# Altium PCB UVM AERO BSPD.PcbDoc (part 1 of 2)
Units mil, origin at the board's own origin, x right, y up, seen from the top; angles counter-clockwise.
Board outline 3235 x 3490 mil, 2 copper layers (Top Layer, Bottom Layer), stack 58.8 mil thick; 114 components, 64 nets, 312 pads, 72 vias.
Unrouted connection lines stored in the file: 7.
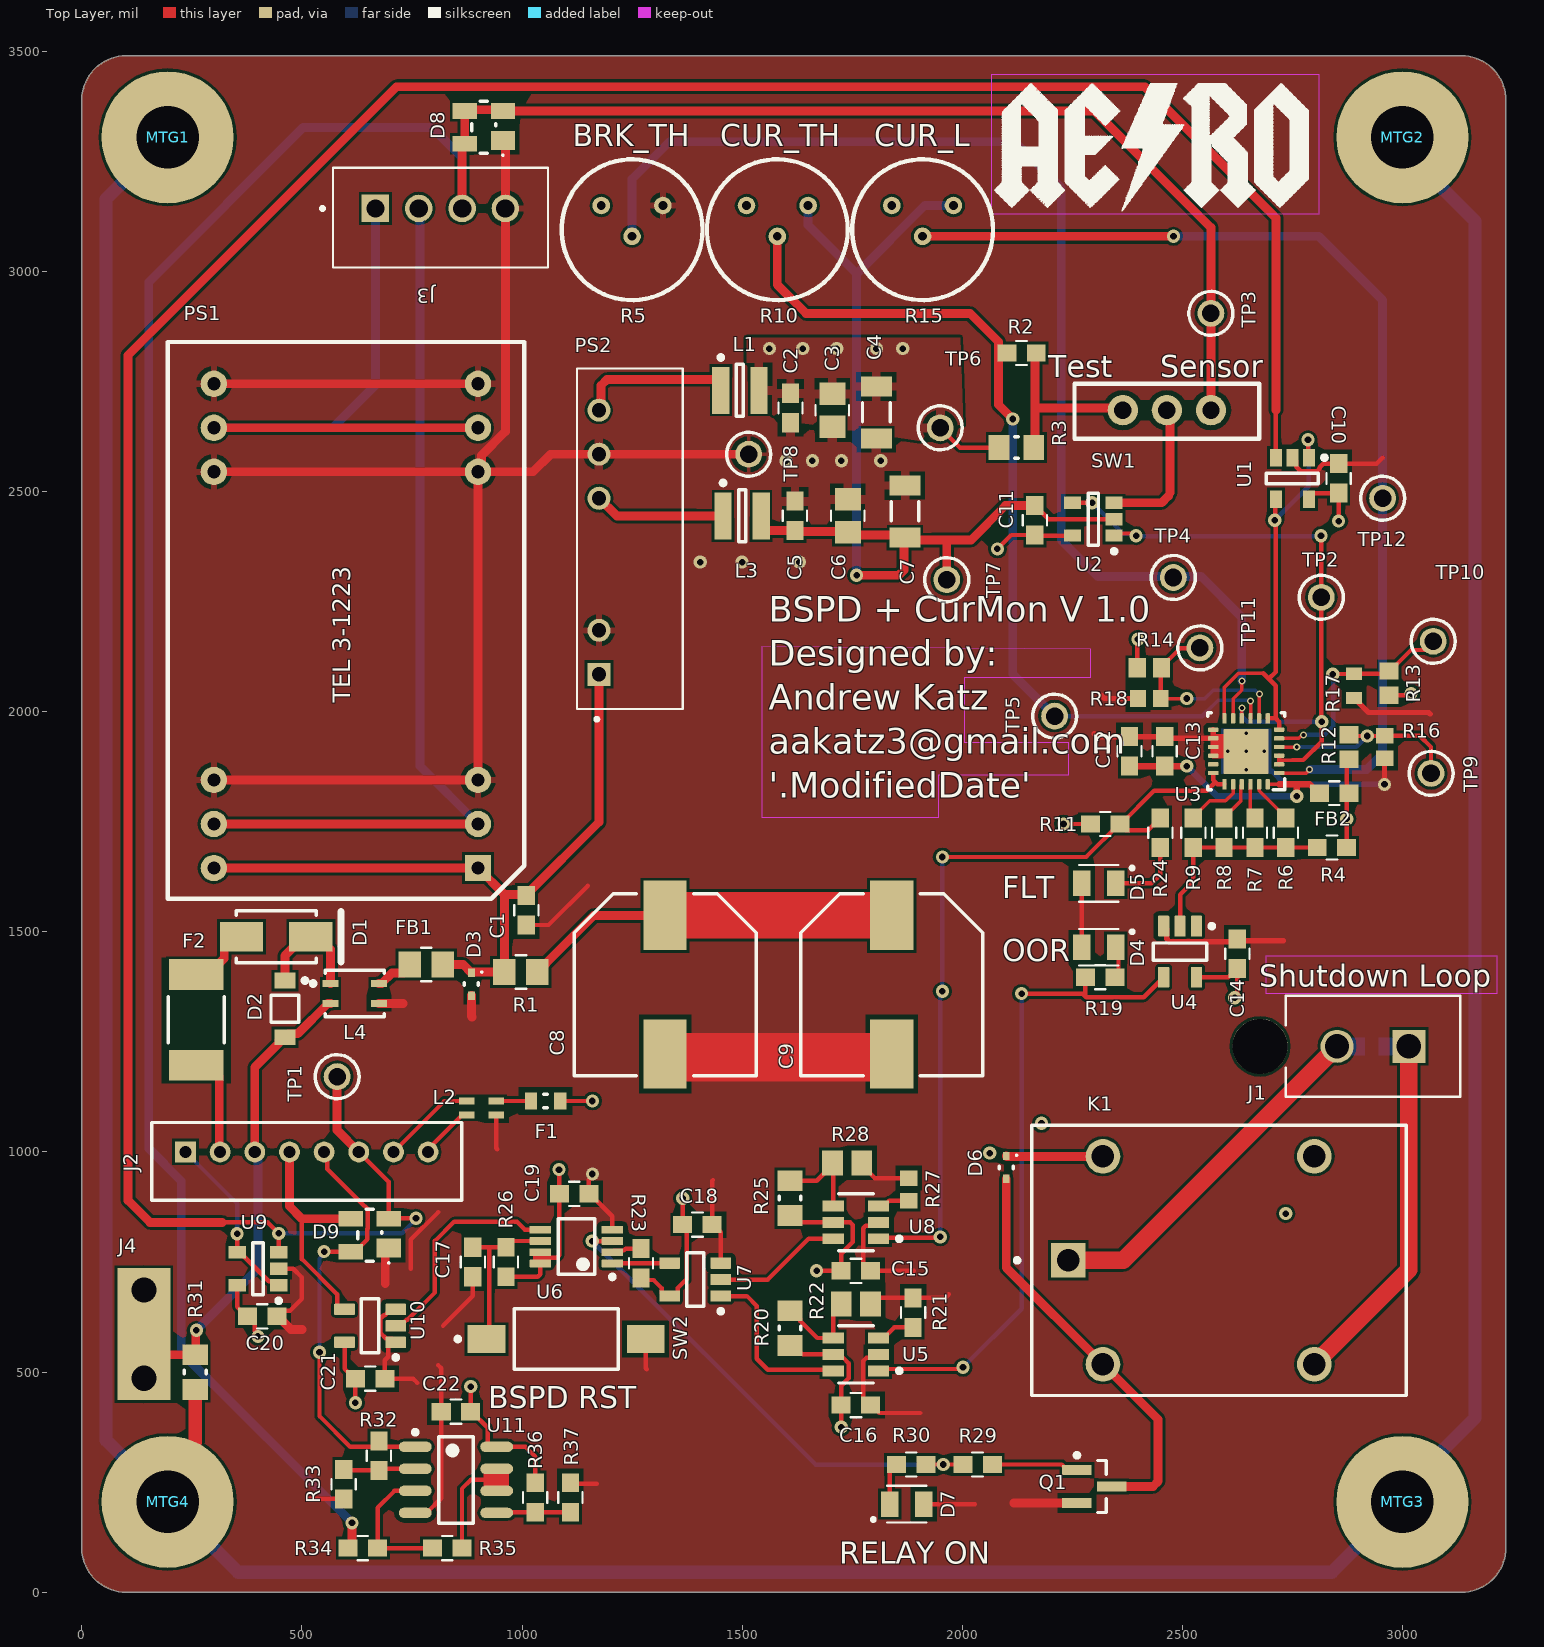
[diagram p0: Top Layer view]
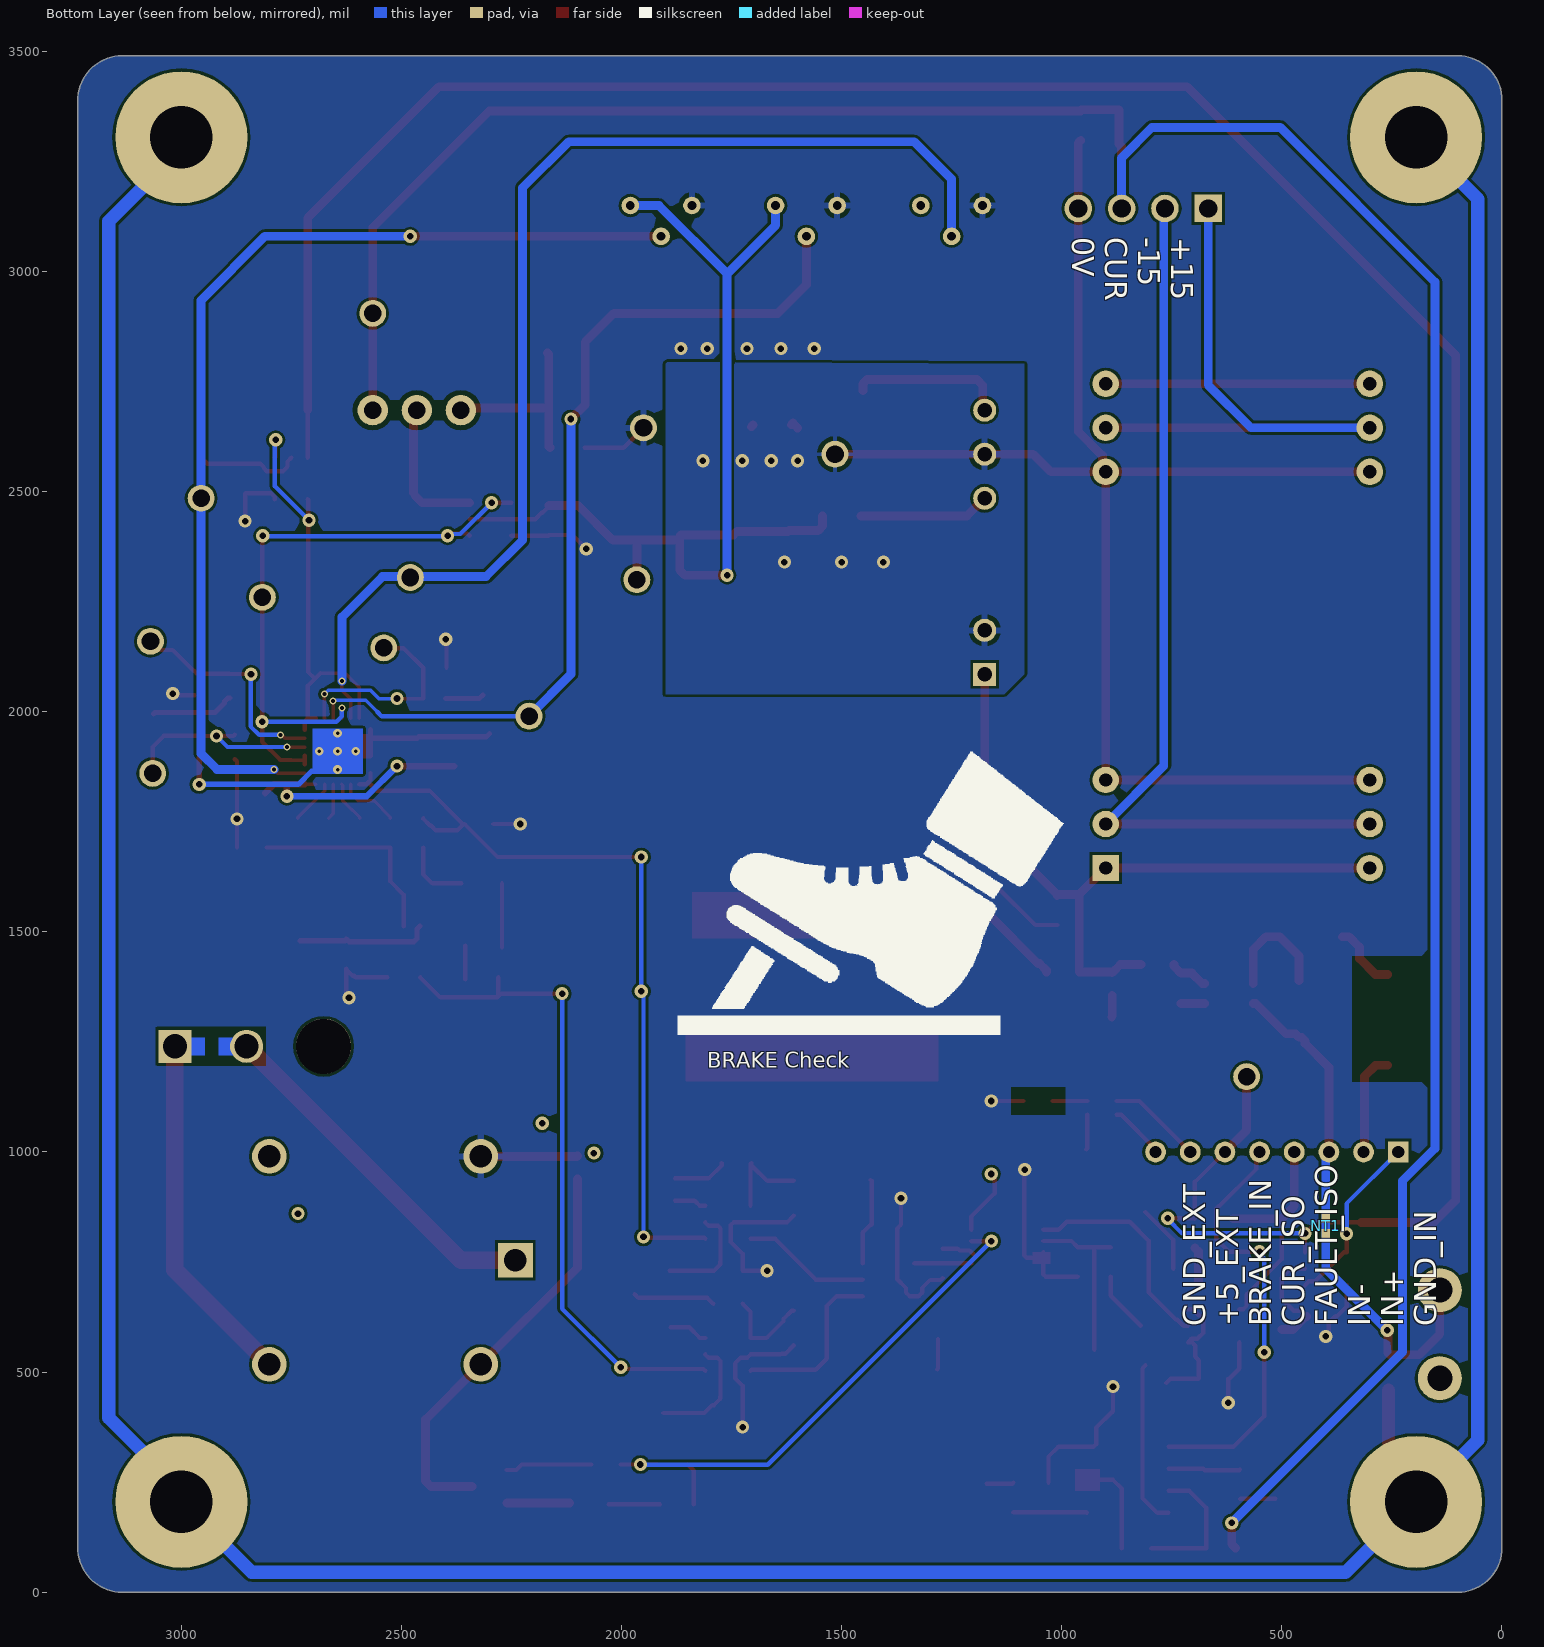
[diagram p1: Bottom Layer view, seen from below]
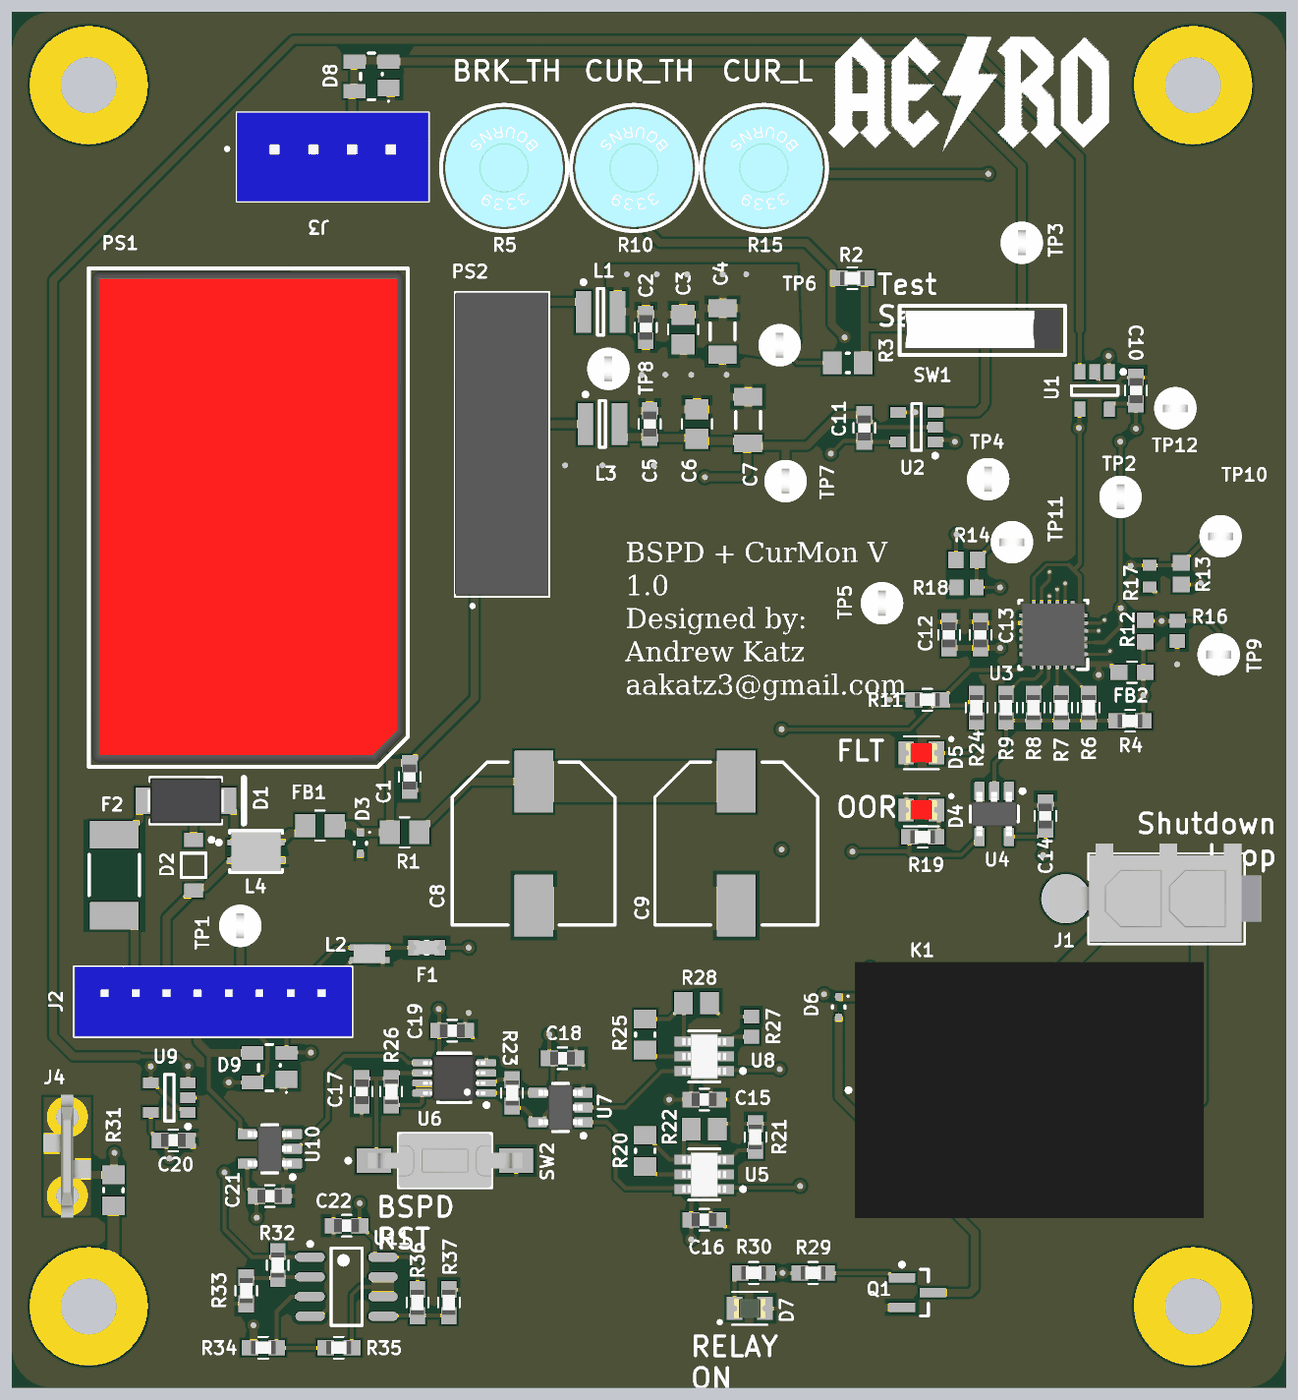
[diagram p3: 3D render of the assembled board from above, using the file's embedded part models]

## Layer stack, top to bottom
Top Solder: solder mask 1, SM-001, Dk 4
Top Layer: signal copper 1.4
Dielectric 1: core 56, FR-4, Dk 4.2
Bottom Layer: signal copper 1.4
Bottom Solder: solder mask 1, SM-001, Dk 4

## Board outline
3235,100 cw(c3135,100) 3135,0 100,0 cw(c100,100) 0,100 0,3390 cw(c100,3390) 100,3490 3135,3490 cw(c3135,3390) 3235,3390

## Design rules (kind name [scope] priority, off if disabled: settings)
Clearance Clearance_1 [IsStitchingVia vs (OnLayer('Top Overlay'))] p1: gap=6 ignorepadtopadclearanceinfootprint=FALSE except(0: Arc-Hole Track-Hole SMDPad-Hole THPad-Hole Via-Hole Fill-Hole Poly-Hole Region-Hole Text-Hole; 10: Arc-THPad Arc-Text Track-THPad Track-Text SMDPad-THPad SMDPad-Text THPad-THPad THPad-Text Fill-Text Poly-Text Region-Text Text-Text; 15: Via-Text)
Clearance [All] p2: gap=6 ignorepadtopadclearanceinfootprint=FALSE except(0: Arc-Hole Track-Hole SMDPad-Hole THPad-Hole Via-Hole Fill-Hole Poly-Hole Region-Hole Text-Hole; 10: Arc-THPad Arc-Text Track-THPad Track-Text SMDPad-THPad SMDPad-Text THPad-THPad THPad-Text Via-Text Fill-Text Poly-Text Region-Text Text-Text)
ComponentClearance [All vs NOT HasFootprint('20MIL_TIE')] p1: gap=10 collisioncheckmode=3 verticalgap=10 showdistances=FALSE
Creepage [All] p1: checkdistance=6
HoleSize [All] p1: absolutevalues=TRUE maxlimit=200 minlimit=7.87 maxpercent=80.000 minpercent=20.000
MinimumAnnularRing [All] p1: minimumring=3
MinimumSolderMaskSliver [All] p1: minsoldermaskwidth=1
PolygonConnect PolygonConnect_1 [All vs IsNamedPolygon('TOP_GND') or IsNamedPolygon('BOT_+5')] p1: thpad.connectstyle=Relief thpad.reliefconductorwidth=15 thpad.reliefentries=4 thpad.polygonreliefangle="90 Angle" thpad.airgapwidth=10 smdpad.connectstyle=NoConnect smdpad.reliefconductorwidth=10 smdpad.reliefentries=4 smdpad.polygonreliefangle="90 Angle" smdpad.airgapwidth=10 via.connectstyle=Direct via.reliefconductorwidth=10 via.reliefentries=4 via.polygonreliefangle="90 Angle" via.airgapwidth=10
PolygonConnect PolygonConnect_3 [All vs IsNamedPolygon('+5_TOP')] p2: thpad.connectstyle=Relief thpad.reliefconductorwidth=20 thpad.reliefentries=4 thpad.polygonreliefangle="90 Angle" thpad.airgapwidth=10 smdpad.connectstyle=Relief smdpad.reliefconductorwidth=20 smdpad.reliefentries=4 smdpad.polygonreliefangle="90 Angle" smdpad.airgapwidth=10 via.connectstyle=Direct via.reliefconductorwidth=10 via.reliefentries=4 via.polygonreliefangle="90 Angle" via.airgapwidth=10
PolygonConnect PolygonConnect_2 [All vs IsNamedPolygon('GND_PSU')] p3: thpad.connectstyle=Relief thpad.reliefconductorwidth=20 thpad.reliefentries=4 thpad.polygonreliefangle="90 Angle" thpad.airgapwidth=10 smdpad.connectstyle=Relief smdpad.reliefconductorwidth=20 smdpad.reliefentries=4 smdpad.polygonreliefangle="90 Angle" smdpad.airgapwidth=10 via.connectstyle=Direct via.reliefconductorwidth=20 via.reliefentries=4 via.polygonreliefangle="90 Angle" via.airgapwidth=10
PolygonConnect [All] p4: thpad.connectstyle=Relief thpad.reliefconductorwidth=15 thpad.reliefentries=4 thpad.polygonreliefangle="90 Angle" thpad.airgapwidth=10 smdpad.connectstyle=Relief smdpad.reliefconductorwidth=10 smdpad.reliefentries=4 smdpad.polygonreliefangle="90 Angle" smdpad.airgapwidth=5 via.connectstyle=Direct via.reliefconductorwidth=10 via.reliefentries=4 via.polygonreliefangle="90 Angle" via.airgapwidth=10
RoutingVias [All] p1: holewidth=15 width=30 viastyle="Through Hole" minholewidth=8.27 minwidth=15.75 maxholewidth=50 maxwidth=100
SilkToSolderMaskClearance [IsPad     or IsVia] p1: minsilkscreentomaskgap=1.8 clearancetoexposedcopper=TRUE
SolderMaskExpansion Via [IsVia] p1: expansion=4 istentingtop=TRUE
SolderMaskExpansion [All] p2: expansion=2 istentingtop=FALSE
Width Width_1 [InNetClass('PWR')] p1: maxlimit=80 minlimit=10 preferedwidth=20 minimp=50.000000 maximp=50.000000 favimp=50.000000
Width [All] p2: maxlimit=100 minlimit=8 preferedwidth=10 minimp=50.000000 maximp=50.000000 favimp=50.000000
26 further rules are at their usual default settings.

## Classes and differential pairs
component class "U_Current Scaler": C22 R32 R33 R34 R35 R36 R37 U11
net class PWR_RAIL: +5 +5_EXT +12 +15 -5 -15 CHASS GND GND_EXT
net class GND_RAIL: CHASS GND GND_EXT
net class HC: SHDN_IN SHDN_OUT
net class PWR: 12V_CAP +5 +5_EXT +5_EXT_F +5_OUT +12 +15 -5 -5_OUT -15 CHASS D+ FUSED GND GND_EXT IN+ IN- L+ SHDN_IN SHDN_OUT
component class U_Relay: D6 D7 K1 Q1 R29 R30
component class "U_IO and Connectors": C20 C21 D8 D9 J1 J2 J3 J4 MTG1 MTG2 MTG3 MTG4 R31 U9 U10
component class "U_Power Supply": C1 C2 C3 C4 C5 C6 C7 C8 C9 D1 D2 D3 F1 F2 FB1 L1 L2 L3 L4 NT1 PS1 PS2 R1
component class U_LatchDelay: C15 C16 C17 C18 C19 D4 D5 R19 R20 R21 R22 R23 R24 R25 R26 R27 R28 SW2 U5 U6 U7 U8
component class U_Comparator: C10 C11 C12 C13 C14 FB2 R2 R3 R4 R5 R6 R7 R8 R9 R10 R11 R12 R13 R14 R15 R16 R17 R18 SW1 TP1 TP2 TP3 TP4 TP5 TP6 TP7 TP8 TP9 TP10 TP11 TP12 U1 U2 U3 U4

## Components (designator, comment, footprint, x,y, rotation, side; value= is the part's Value field where it differs from the comment)
C1 "CAP 0603 10UF 25V 20% X5R" 0603_CAP 1010,1549.02 r90 top value=10UF
C2 "CAP 0603 1UF 50V 10% X7R" 0603_CAP 1610,2690 r90 top value=1UF
C3 "CAP 0805 4.7UF 35V 10% X7R" 0805_CAP 1705,2685 r90 top value=4.7UF
C4 "CAP 47uF 10V 1206(3216)" CAPC1206(3216)190_N 1805,2680 r90 top value=47uF
C5 "CAP 0603 1UF 50V 10% X7R" 0603_CAP 1620,2445 r90 top value=1UF
C6 "CAP 0805 4.7UF 35V 10% X7R" 0805_CAP 1740,2445 r90 top value=4.7UF
C7 "CAP 47uF 10V 1206(3216)" CAPC1206(3216)190_N 1870,2455 r90 top value=47uF
C8 "UUD1V331MNL1GS" NIC-CAPA2-10X10_V 1325,1380 r270 top
C9 "UUD1V331MNL1GS" NIC-CAPA2-10X10_V 1840,1380 r270 top
C10 "CAP 0603 0.1UF 16V 10% X7R" 0603_CAP 2855,2530 r270 top value=0.1UF
C11 "CAP 0603 0.1UF 16V 10% X7R" 0603_CAP 2165,2435 r270 top value=0.1UF
C12 "CAP 0603 0.1UF 16V 10% X7R" 0603_CAP 2380,1910 r270 top value=0.1UF
C13 "CAP 0603 10UF 25V 20% X5R" 0603_CAP 2460,1910 r270 top value=10UF
C14 "CAP 0603 0.1UF 16V 10% X7R" 0603_CAP 2625,1450 r270 top value=0.1UF
C15 "CAP 0603 10UF 25V 20% X5R" 0603_CAP 1758.46,730 r180 top value=10UF
C16 "CAP 0603 10UF 25V 20% X5R" 0603_CAP 1758.46,425 r180 top value=10UF
C17 "CAP 0603 1PF 50V 0.05PF MLO" 0603_CAP 888.46,750 r270 top value=1PF
C18 "CAP 0603 0.1UF 16V 10% X7R" 0603_CAP 1398.46,835 r180 top value=0.1UF
C19 "CAP 0603 0.1UF 16V 10% X7R" 0603_CAP 1118.46,905 r180 top value=0.1UF
C20 "CAP 0603 0.1UF 16V 10% X7R" 0603_CAP 410,626.5 r180 top value=0.1UF
C21 "CAP 0603 0.1UF 16V 10% X7R" 0603_CAP 655,485 r180 top value=0.1UF
C22 "CAP 0603 0.1UF 16V 10% X7R" 0603_CAP 850,410 r0 top value=0.1UF
D1 "B340A-13-F" DIOD-SMA-2_V 441.57,1488.74 r0 top
D2 "SZMMSZ5243BT1G" ONSC-SOD-123-2-425-04_V 461.26,1325 r270 top
D3 "ESD5Z12T1G" ONSC-SOD-523-2-502-01_V 885,1381.12 r270 top
D4 "SM0805HCL" LEDC2012X135N_SM0805HCL(Primary) 2310,1465.21 r180 top
D5 "SM0805HCL" LEDC2012X135N_SM0805HCL(Primary) 2310,1610 r180 top
D6 "NSR0340V2T1G" ONSC-SOD-523-2-502-01_V 2100,965 r270 top
D7 "SM0805GCL" LEDC2012X135N_SM0805GCL(Primary) 1874,200 r0 top
D8 "SP0503BAHTG" LFUS-SOT143-4_V 913.31,3327.4 r180 top
D9 "SP0503BAHTG" LFUS-SOT143-4_V 654,811 r180 top
F1 "MF-FSMF010X-2" MF-FSMF 1053.46,1115.75 r180 top
F2 "1812L050/30PR" LFUS-1812L05030PR_V 260,1300 r90 top
FB1 "Ferrite Chip 1500 Ohms" 0805 782.4,1425.75 r0 top
FB2 "Ferrite Chip 120 Ohms" 0603 2845,1815 r180 top
J1 "1-770872-0" CON2_1X2_P163_VM_ALT 3014.63,1240 r180 top value=Value
J2 "B8B-PH-K-S(LF)(SN)" B8B-PH-K 511.1,978.35 r180 top
J3 "B4B-XH-A(LF)(SN)" B4B-XH-A(LF)(SN) 667.03,3143.31 r0 top
J4 "1217861-1" 1217861-1 141,586 r0 top
K1 "Relay_Omron_Electronics_Inc._G5LE-1_DC5_eec" Omron_Electronics_Inc._G5LE-1_DC5_0 2583.46,753.78 r180 top locked
L1 "SRN3015-220M" BOUR-SRN3015-2_V 1495,2730 r0 top
L2 "744231261" WE-CNSW-0805 908.17,1100 r180 top
L3 "SRN3015-220M" BOUR-SRN3015-2_V 1500,2445 r0 top
L4 "ACP3225-102-2P-T000" TDK-ACP3225-102-2P-T000-4_V 620,1360 r0 top
MTG1 "PCB MTG M3" MTG-M3 195,3305 r0 top
MTG2 "PCB MTG M3" MTG-M3 3000,3305 r0 top
MTG3 "PCB MTG M3" MTG-M3 3000,205 r0 top
MTG4 "PCB MTG M3" MTG-M3 195,205 r0 top
NT1 "NET TIE" 20MIL_TIE 400,850 r270 bottom net-tie
PS1 "TEL 3-1223" "TEL 3-1223" 300,1645 r90 top
PS2 "NMK1205SC" NMV0505SC 1175,2085 r90 top
Q1 "BSH105,215" NXP-SOT23_M 2300,240 r0 top
R1 "RES 0805 2 1%" 0805_RES 997.4,1408.62 r0 top value=2
R2 "RES 0603 330K 1%" 0603_RES 2134.78,2815 r0 top value=330K
R3 "RT0805BRE071ML" RESC2013X60X35ML10T20 2123.19,2600 r180 top value=1M
R4 "RES 0603 10K 1%" 0603_RES 2840,1691.54 r0 top value=10K
R5 "3339H-1-103LF" 3339H-1-103LF 1180,3150 r0 top
R6 "RES 0603 0 5%" 0603_RES 2735,1725 r270 top value=0
R7 "RES 0603 0 5%" 0603_RES 2665.16,1725 r270 top value=0
R8 "RES 0603 0 5%" 0603_RES 2595,1725 r270 top value=0
R9 "RES 0603 0 5%" 0603_RES 2525,1725 r270 top value=0
R10 "3339H-1-103LF" 3339H-1-103LF 1510,3150 r0 top
R11 "RES 0603 10K 1%" 0603_RES 2325,1745 r0 top value=10K
R12 "RR0816P-301-D" RESC1608X50X30ML20T20 2878.5,1919.84 r270 top
R13 "RR0816P-183-D" RESC1608X50X30ML20T20 2970,2065 r270 top
R14 "RR0816P-301-D" RESC1608X50X30ML20T20 2425,2100 r180 top
R15 "3339H-1-103LF" 3339H-1-103LF 1840,3150 r0 top
R16 "RR0816P-272-D" RESC1608X50X30NL20T20 2960,1920 r90 top
R17 "RT0603DRE072KL" RESC1608X55X25NL10T15 2890,2058.88 r90 top
R18 "RR0816P-272-D" RESC1608X50X30NL20T20 2425,2030 r0 top
R19 "RES 0603 620 1%" 0603_RES 2313.34,1396.93 r0 top value=620
R20 "RT0805BRE071ML" RESC2013X60X35ML10T20 1608.46,600 r270 top value=1M
R21 "RES 0603 49.9K 0.1%" 0603_RES 1888.46,635 r270 top value=49.9K
R22 "ERA6AEB6813V" RESC2013X60X40NL20T25 1758.46,655 r0 top value=681k
R23 "RES 0603 200 1%" 0603_RES 1270.28,747.01 r270 top value=200
R24 "RES 0603 620 1%" 0603_RES 2450,1725 r270 top value=620
R25 "RT0805BRE071ML" RESC2013X60X35ML10T20 1608.46,895 r270 top value=1M
R26 "RES 0603 47K 1%" 0603_RES 963.46,750 r90 top value=47K
R27 "RG1608P-9312-B-T5" RESC1608X50X30NL20T20 1878.46,915 r270 top value=93.1k
R28 "ERA6AEB6813V" RESC2013X60X40NL20T25 1738.46,975 r0 top value=681k
R29 "RES 0603 200 1%" 0603_RES 2035,290 r0 top value=200
R30 "RES 0603 620 1%" 0603_RES 1884,290 r180 top value=620
R31 "RT0805BRE071ML" RESC2013X60X35ML10T20 257.6,500 r270 top value=1M
R32 "RES 0603 62.6K 0.1%" 0603_RES 675,310 r270 top value=62.6K
R33 "RES 0603 100K 0.1%" 0603_RES 595,245 r90 top value=100K
R34 "RES 0603 100K 0.1%" 0603_RES 638.46,100 r0 top value=100K
R35 "RES 0603 62.6K 0.1%" 0603_RES 830.31,100 r180 top value=62.6K
R36 "RES 0603 100K 0.1%" 0603_RES 1030,215 r90 top value=100K
R37 "RES 0603 100K 0.1%" 0603_RES 1110,215 r270 top value=100K
SW1 "CL-SA-12C-02" CL-SA-12C-02 2465,2685 r0 top
SW2 "FSMSMTR" TECO-FSMSMTR_V 1100,575 r0 top
TP1 "5002" KSTN-5002 580,1171 r0 top
TP2 "5002" KSTN-5002 2815.77,2260 r0 top
TP3 "5002" KSTN-5002 2565,2905 r0 top
TP4 "5002" KSTN-5002 2479.57,2305 r0 top
TP5 "5002" KSTN-5002 2210,1990 r0 top
TP6 "5000" KSTN-5002 1950,2645 r0 top
TP7 "5001" KSTN-5002 1965,2300 r0 top
TP8 "5116" KSTN-5002 1515,2585 r0 top
TP9 "5002" KSTN-5002 3065,1860 r90 top
TP10 "5002" KSTN-5002 3070,2160 r90 top
TP11 "5002" KSTN-5002 2540,2145 r90 top
TP12 "5002" KSTN-5002 2955,2485 r90 top
U1 "NCS2003SN2T1G" ONSC-TSOP-5-483-02_V 2750,2530 r270 top
U2 "NCS2003SN2T1G" ONSC-TSOP-5-483-02_V 2297.76,2437.4 r180 top
U3 "LMV7231SQE/NOPB" RTW0024A_V 2645,1910 r180 top
U4 "SN74LVC1G04DBVR" DBV0005A_M 2495,1455 r270 top
U5 "LTC6994CS6-1#TRMPBF" Linear_Technologies_LTC6994CS6-1#TRMPBF_0 1758.46,540 r180 top value=SKIP
U6 "SN74LVC2G74DCTR" DCT0008A_M 1123.46,785 r180 top
U7 "SN74AHCT1G32DBVR" DBV0005A_M 1393.46,710 r180 top
U8 "LTC6994CS6-1#TRMPBF" Linear_Technologies_LTC6994CS6-1#TRMPBF_0 1758.46,840 r180 top value=SKIP
U9 "NCS2003SN2T1G" ONSC-TSOP-5-483-02_V 400,734.72 r180 top
U10 "SN74LV1T125DBVR" DBV0005A_M 655,605 r180 top
U11 "MCP6002T-I/SN" SOIC-SN8_L 850,255 r0 top

## Footprints (in the part's own frame and the unit in brackets; to place one, negate y for a bottom-side part, rotate by r counter-clockwise, add the part's x,y. Pads: shape width x height; smd on the part's side, far side on the other; paste and mask are expansions set on the pad)
20MIL_TIE [mil]
  rect 20x20 smd paste-100 mask-100: 1(0,0) 2(35,0)
  Top Layer lines w20: 35,0 0,0
0603 [mil] "Body 1.6 x 0.8 mm (LxW typ)"
  rect 43x39 smd: 1(-33.5,0) 2(33.5,0)
  silkscreen extent -12,-27 12,27, body extent -34,-19 34,19, height 38
0603_CAP [mm]
  rect 1.1x1 smd: 1(-0.85,0) 2(0.85,0)
  silkscreen extent -0.3,-0.7 0.3,0.7, body extent -0.8,-0.43 0.8,0.43, height 0.95
0603_RES [mil]
  rect 43x39 smd: 1(-33.46,0) 2(33.46,0)
  silkscreen extent -12,-28 12,28, body extent -32,-19 32,19, height 34
0805 [mm] "Body 2.0 x 1.2 mm (LxW typ)"
  rect 1.3x1.5 smd: 1(-0.95,0) 2(0.95,0)
  silkscreen extent -0.3,-0.97 0.3,0.97, body extent -1.15,-0.72 1.15,0.72, height 1.1
0805_CAP [mm]
  rect 1.3x1.5 smd: 1(-0.95,0) 2(0.95,0)
  silkscreen extent -0.3,-0.97 0.3,0.97, body extent -1,-0.65 1,0.66, height 1.52
0805_RES [mm]
  rect 1.3x1.5 smd: 1(-0.95,0) 2(0.95,0)
  silkscreen extent -0.3,-0.97 0.3,0.97, body extent -1.09,-0.7 1.09,0.7, height 1.1
3339H-1-103LF [mil]
  round 40 hole 20 paste-10000: 1(0,0) 2(70,-70) 3(140,0)
  silkscreen extent -90,-215 230,105, body extent -80,-205 220,95, height 251
1217861-1 [mil]
  round 100 hole 57: 1(0,-100) 1(0,100)
  rect 120x300 smd paste-39370.1 mask+4: 1(0,0)
  body extent -61,-156 60,156, height 415
B4B-XH-A(LF)(SN) [mm]
  rect 1.59x1.59 hole 1.06: 1(0,0)
  round 1.59 hole 1.06: 2(2.5,0) 3(5,0) 4(7.5,0)
  silkscreen extent -3.16,-3.4 9.95,2.35, body extent -2.45,-3.4 9.95,2.35, height 7
B8B-PH-K [mm]
  rect 1.2x1.2 hole 0.7 paste-1000 mask+0: 1(7,-0.55)
  round 1.2 hole 0.7 paste-1000 mask+0: 2(5,-0.55) 3(3,-0.55) 4(1,-0.55) 5(-1,-0.55) 6(-3,-0.55) 7(-5,-0.55) 8(-7,-0.55)
  silkscreen extent -8.95,-2.25 8.95,2.25, body extent -8.95,-2.25 8.95,2.25, height 6
BOUR-SRN3015-2_V [mm] "SMD, 2-Leads, Body 3x3mm, Height 1.5mm"
  rect 1x2.7 smd: 1(-1.1,0) 2(1.1,0)
  silkscreen extent -1.22,-1.5 0.2,2.02, body extent -1.5,-1.5 1.5,1.5, height 1.5
CAPC1206(3216)190_N [mm] "Chip Capacitor, Body 3.2x1.6mm, Height 1.9mm, IPC Medium Density"
  rect 1.15x1.8 smd: 1(-1.5,0) 2(1.5,0)
  silkscreen extent -0.55,-0.8 0.55,0.8, body extent -1.7,-0.9 1.7,0.9, height 1.9
CL-SA-12C-02 [mm]
  round 1.75 hole 1 paste-2.54: 1(-2.54,0) 2(0,0) 3(2.54,0)
  silkscreen extent -5.33,-1.65 5.33,1.52, body extent -5,-1.27 5,1.27, height 6.4
CON2_1X2_P163_VM_ALT [mil]
  rect 75x75 hole 55: 1(0,0)
  round 75 hole 55: 2(162.99,0)
  round 125 hole 125 unplated: 3(338,0)
  Bottom Layer region: 142.63,21 99.63,21 99.63,-20 142.63,-20
  Bottom Layer region: 68.63,21 33.63,21 33.63,-20 68.63,-20
  silkscreen extent -117,-115 280,115, body extent -159,-140 380,110, height 566
DBV0005A_M [mm] "SOT23, 5-Leads, Body 3.05x1.75mm, Pitch 0.95mm, IPC Low Density"
  rrect15% 1.2x0.65 smd: 1(-1.475,0.95) 2(-1.475,0) 3(-1.475,-0.95) 4(1.475,-0.95) 5(1.475,0.95)
  silkscreen extent -1.6,-1.55 0.5,1.95, body extent -1.42,-1.46 1.42,1.46, height 1.08
DCT0008A_M [mm] "SOP, 8-Leads, Body 2.9x3.2mm, Pitch 0.65mm, IPC Low Density"
  rrect22% 1.25x0.45 smd: 1(-2.075,0.975) 2(-2.075,0.325) 3(-2.075,-0.325) 4(-2.075,-0.975) 5(2.075,-0.975) 6(2.075,-0.325) 7(2.075,0.325) 8(2.075,0.975)
  silkscreen extent -2.2,-1.6 1.05,1.87, body extent -2.01,-1.47 2.01,1.48, height 1.3
DIOD-SMA-2_V [mm] "Molded Diode, 2-Leads, Body 4.6x2.92mm"
  rect 2.5x1.7 smd: 1(-2,0) 2(2,0)
  silkscreen extent -2.3,-1.5 3.75,1.5, body extent -2.52,-1.46 2.52,1.46, height 2.4
KSTN-5002 [mm] "Test Point, Through Hole, Dia 2.54mm"
  round 1.55 hole 1.016: 1(0,0)
  silkscreen extent -1.27,-1.27 1.27,1.27, body extent -1.25,-1.25 1.25,1.25, height 4.62
LEDC2012X135N_SM0805GCL(Primary) [mm]
  rect 1.01x1.47 smd: A(-0.98,0) C(0.98,0)
  silkscreen extent -2.03,-1.05 1.13,1.05, body extent -1,-0.62 1,0.62, height 1.12
LEDC2012X135N_SM0805HCL(Primary) [mm]
  rect 1.01x1.47 smd: A(-0.98,0) C(0.98,0)
  silkscreen extent -2.03,-1.05 1.13,1.05, body extent -1,-0.62 1,0.62, height 1.12
LFUS-1812L05030PR_V [mm] "SMD, 2-Leads, Body 4.55x3.24mm"
  rect 1.78x3.15 smd: 1(-2.615,0) 2(2.615,0)
  silkscreen extent -1.33,-1.62 1.33,1.62, body extent -2.27,-1.62 2.27,1.62, height 1
LFUS-SOT143-4_V [mm] "SOT143, 4-Leads, Body 3.04x1.4mm, Pitch 1.90mm"
  rect 1.4x1.1 smd: 1(-1.1,0.75)
  rect 1.4x0.9 smd: 2(-1.1,-0.95) 3(1.1,-0.95) 4(1.1,0.95)
  silkscreen extent -1.15,-1.5 0.7,1.65, body extent -0.7,-1.52 0.7,1.52, height 1.22
Linear_Technologies_LTC6994CS6-1#TRMPBF_0 [mm]
  rect 1.22x0.62 smd paste+0 mask+0: 1(-1.31,0.95) 2(-1.31,0) 3(-1.31,-0.95) 4(1.31,-0.95) 5(1.31,0) 6(1.31,0.95)
  silkscreen extent -2.63,-1.65 1,1.65, body extent -1.41,-1.44 1.41,1.46, height 0.96
MF-FSMF [mm] "MF-FSMF Series - PTC Resettable Fuse"
  rect 0.7x1 smd: 1(-0.85,0) 2(0.85,0)
  Top Layer pour cut-out: -1.55,0.8 1.55,0.8 1.55,-0.8 -1.55,-0.8
  Bottom Layer pour cut-out: -1.55,0.8 1.55,0.8 1.55,-0.8 -1.55,-0.8
  silkscreen extent -0.1,-0.4 0.1,0.4, body extent -0.82,-0.42 0.83,0.43, height 0.48
MTG-M3 [mil]
  round 300 hole 142: 1(0,0)
NIC-CAPA2-10X10_V [mm] "Aluminum Electrolytic Capacitor, Diameter 10mm, Height 10.8mm, Pitch 8mm"
  rect 4x2.5 smd: 1(-4,0) 2(4,0)
  silkscreen extent -5.25,-5.25 5.25,5.25, body extent -4.96,-4.99 5,4.99, height 10.8
NMV0505SC [mm]
  rect 1.328x1.328 hole 0.82: 1(0,0)
  round 1.328 hole 0.82: 2(2.54,0) 5(10.16,0) 6(12.7,0) 7(15.24,0)
  silkscreen extent -2.69,-4.83 17.65,1.27, body extent -1.88,-4.77 17.62,1.25, height 10.04
NXP-SOT23_M [mm] "SOT23, 3-Leads, Body 3x1.4mm, Pitch 0.95mm, IPC Low Density"
  rect 1.7x0.6 smd: 1(-1,0.95) 2(-1,-0.95) 3(1,0)
  silkscreen extent -1.12,-1.5 0.7,1.92, body extent -0.7,-1.5 0.7,1.5, height 1.1
Omron_Electronics_Inc._G5LE-1_DC5_0 [mm]
  rect 2x2 hole 1.3 paste-1000 mask+0: 1(8.7,0)
  round 2 hole 1.3 paste-1000 mask+0: 2(6.7,6) 3(-5.5,6) 4(-5.5,-6) 5(6.7,-6)
  silkscreen extent -10.8,-7.8 11.77,7.8, body extent -11.35,-8.35 11.35,8.35, height 0.25
ONSC-SOD-123-2-425-04_V [mm] "SOD, 2-Leads, Body 2.69x1.6mm"
  rect 0.91x1.22 smd: 1(-1.635,0) 2(1.635,0)
  silkscreen extent -1.76,-0.8 0.78,1.29, body extent -1.35,-0.8 1.35,0.8, height 1.35
ONSC-SOD-523-2-502-01_V [mm] "SOD, 2-Leads, Body 1.2x0.8mm"
  rect 0.48x0.4 smd: 1(-0.66,0) 2(0.66,0)
  silkscreen extent -0.75,-0.4 0.07,0.65, body extent -0.6,-0.4 0.6,0.4, height 0.7
ONSC-TSOP-5-483-02_V [mm] "SOP, 5-Leads, Body 3x1.5mm, Pitch 0.95mm"
  rect 1x0.7 smd: 1(-1.2,0.95) 2(-1.2,0) 3(-1.2,-0.95) 4(1.2,-0.95) 5(1.2,0.95)
  silkscreen extent -1.32,-1.5 0.3,1.98, body extent -0.75,-1.5 0.75,1.5, height 1.1
RESC1608X50X30ML20T20 [mm] "Chip Resistor, 2-Leads, Body 1.60x0.80mm, IPC Low Density"
  rect 1x1.1 smd: 1(-0.7,0) 2(0.7,0)
  body extent -0.9,-0.5 0.9,0.5, height 0.5
RESC1608X50X30NL20T20 [mm] "Chip Resistor, 2-Leads, Body 1.60x0.80mm, IPC Medium Density"
  rect 0.9x1 smd: 1(-0.65,0) 2(0.65,0)
  body extent -0.9,-0.5 0.9,0.5, height 0.5
RESC1608X55X25NL10T15 [mm] "Chip Resistor, 2-Leads, Body 1.60x0.80mm, IPC Medium Density"
  rect 0.7x0.9 smd: 1(-0.7,0) 2(0.7,0)
  body extent -0.85,-0.45 0.85,0.45, height 0.55
RESC2013X60X35ML10T20 [mm] "Chip Resistor, 2-Leads, Body 2.00x1.25mm, IPC Low Density"
  rect 1.2x1.45 smd: 1(-1,0) 2(1,0)
  silkscreen extent -0.1,-0.63 0.1,0.63, body extent -1.05,-0.67 1.05,0.67, height 0.6
RESC2013X60X40NL20T25 [mm] "Chip Resistor, 2-Leads, Body 2.00x1.25mm, IPC Medium Density"
  rect 1.2x1.45 smd: 1(-0.85,0) 2(0.85,0)
  body extent -1.1,-0.72 1.1,0.72, height 0.6
RTW0024A_V [mm] "QFN, 24-Leads, Body 4x4mm, Pitch 0.5mm, Thermal Pad 2.6x2.6mm, TI Recommended"
  rrect40% 0.6x0.25 smd: 1(-1.9,1.25) 2(-1.9,0.75) 3(-1.9,0.25) 4(-1.9,-0.25) 5(-1.9,-0.75) 6(-1.9,-1.25) 13(1.9,-1.25) 14(1.9,-0.75) 15(1.9,-0.25) 16(1.9,0.25) 17(1.9,0.75) 18(1.9,1.25)
  rrect40% 0.25x0.6 smd: 7(-1.25,-1.9) 8(-0.75,-1.9) 9(-0.25,-1.9) 10(0.25,-1.9) 11(0.75,-1.9) 12(1.25,-1.9) 19(1.25,1.9) 20(0.75,1.9) 21(0.25,1.9) 22(-0.25,1.9) 23(-0.75,1.9) 24(-1.25,1.9)
  rrect4% 2.6x2.6 smd paste-1.3: 25(0,0)
  silkscreen extent -2.22,-2.22 2.22,2.22, body extent -2,-2 2,2, height 0.8
SOIC-SN8_L [mm] "SOIC, 8-Leads, Body 4.9x3.9mm, Pitch 1.27mm, IPC High Density"
  oval 1.9x0.6 smd: 1(-2.35,1.905) 2(-2.35,0.635) 3(-2.35,-0.635) 4(-2.35,-1.905) 5(2.35,-1.905) 6(2.35,-0.635) 7(2.35,0.635) 8(2.35,1.905)
  silkscreen extent -2.47,-2.5 1,2.88, body extent -2,-2.5 2,2.5, height 1.75
TDK-ACP3225-102-2P-T000-4_V [mm] "SMD, 4-Leads, Body 3.4x2.7mm"
  rect 0.9x0.4 smd: 1(-1.4,0.575) 2(-1.4,-0.575) 3(1.4,-0.575) 4(1.4,0.575)
  silkscreen extent -2.52,-1.35 1.7,1.35, body extent -1.6,-1.26 1.6,1.24, height 1.92
TECO-FSMSMTR_V [mm] "SMD, 2-Leads, Body 6x3.5mm, Pitch 9.19mm"
  rect 2.2x1.6 smd: 1(-4.595,0)
  rect 2.18x1.6 smd: 2(4.595,0)
  silkscreen extent -6.37,-1.75 3,1.75, body extent -4.98,-1.75 4.98,1.75, height 4.4
"TEL 3-1223" [mil]
  rect 60x60 hole 30: 1(0,-600)
  round 60 hole 30: 2(100,-600) 3(200,-600) 10(900,-600) 11(1000,-600) 12(1100,-600) 13(1100,0) 14(1000,0) 15(900,0) 22(200,0) 23(100,0) 24(0,0)
  silkscreen extent -70,-705 1195,105, body extent -60,-697 1188,98, height 402
WE-CNSW-0805 [mm] "SMD Inductor, 4-Leads, Body 1.4 x 2.2 mm"
  rect 0.9x0.4 smd: 1(-0.85,0.4) 2(0.85,0.4) 3(0.85,-0.4) 4(-0.85,-0.4)
  body extent -1,-0.6 1,0.6, height 1.18

## Part data
C1 C13 C15 C16: "Capacitor Surface Mount 0603 Footprint 10UF 25V 20% Tolerance Ceramic X5R", Manufacturer=Various, PCB Package=0603, Tolerance=20%, Voltage=25V, ComponentLink1Description="Manufacturer Website", ComponentLink2Description="Component Datasheet", ComponentLink3Description="Octopart Link", Description in Visual="Cap SMT 0603 10UF 25V 20% Ceramic X5R", Manufacturer P/N=Various, P/N="CAP 0603 10UF 25V 20% X5R", Type="Ceramic X5R", Val=10UF, Vol=25V
C2 C5: "Capacitor Surface Mount 0603 Footprint 1UF 50V 10% Tolerance Ceramic X7R", Manufacturer=Various, PCB Package=0603, Tolerance=10%, Voltage=50V, ComponentLink1Description="Manufacturer Website", ComponentLink2Description="Component Datasheet", ComponentLink3Description="Octopart Link", Description in Visual="Cap SMT 0603 1UF 50V 10% Ceramic X7R", Manufacturer P/N=Various, P/N="CAP 0603 1UF 50V 10% X7R", Type="Ceramic X7R", Val=1UF, Vol=50V
C3 C6: "Capacitor Surface Mount 0805 Footprint 4.7UF 35V 10% Tolerance Ceramic X7R", Manufacturer=Various, PCB Package=0805, Tolerance=10%, Voltage=35V, ComponentLink1Description="Manufacturer Website", ComponentLink2Description="Component Datasheet", ComponentLink3Description="Octopart Link", Description in Visual="Cap SMT 0805 4.7UF 35V 10%  Cer X7R", Manufacturer P/N=Various, P/N="CAP 0805 4.7UF 35V 10% X7R", Type="Ceramic X7R", Val=4.7UF, Vol=35V
C4 C7: library part CMP-1037-05002-1, "CAP 47uF 10V ±20% 1206 (3216 Metric) Thickness 1.9mm SMD", Case-EIA=1206, Case-Metric=3216, Rated Voltage="10 V", Tolerance=Â±20%, Max Thickness="1.9 mm", Technology=SMT
C8 C9: library part CMP-0687-00008-1, "Aluminum Electrolytic Capacitor, UD Series, Low Impedance, 330 uF, 35 V, + / - 20%, -55 to 105 degC, Chip Type, 10 x 10 mm D x L, Pb-Free, Reel", Manufacturer=Nichicon, Rated Capacitance="330 uF", Rated Ripple Current (at 100kHz)="670 mA", Rated Voltage="35 V", Tolerance Rated Capacitance="-20 to 20%", ComponentLink1Description="Manufacturer URL", ComponentLink1URL=http://www.nichicon.co.jp/, ComponentLink2Description=Datasheet, ComponentLink2URL=http://products.nichicon.co.jp/en/pdf/XJA043/e-ud.pdf, ComponentLink3Description="Package Specification", ComponentLink3URL=http://products.nichicon.co.jp/en/pdf/XJA043/e-ud.pdf, DatasheetVersion=08/2012, Diameter="10 mm", Endurance Time="5000 h", Impedance="0.09 Ohm", Length="10 mm", Mounting Technology="Surface Mount", PackageDescription="2-Pin Surface Mount Device, Diameter 10 mm, Height 10 mm, Pitch 8 mm", PackageReference=CAPAE-D10H10, Packing="Dia382mm Reel", PartNumber=UUD1V331MNL1GS, RoHS=TRUE
C10 C11 C12 C14 C18 C19 C20 C21 C22: "Capacitor Surface Mount 0603 Footprint 0.1UF 16V 10% Tolerance Ceramic X7R", Manufacturer=Various, PCB Package=0603, Tolerance=10%, Voltage=16V, ComponentLink1Description="Manufacturer Website", ComponentLink2Description="Component Datasheet", ComponentLink3Description="Octopart Link", Description in Visual="Cap SMT 0603 0.1UF 16V 10%  Cer X7R", Manufacturer P/N=Various, P/N="CAP 0603 0.1UF 16V 10% X7R", Type="Ceramic X7R", Val=0.1UF, Vol=16V
C17: "Capacitor Surface Mount 0603 Footprint 1PF 50V 0.05PF Tolerance MLO", Manufacturer=Various, PCB Package=0603, Tolerance=0.05PF, Voltage=50V, ComponentLink1Description="Manufacturer Website", ComponentLink2Description="Component Datasheet", ComponentLink3Description="Octopart Link", Description in Visual="Cap SMT 0603 1PF 50V 0.05PF  MLO", Manufacturer P/N=Various, P/N="CAP 0603 1PF 50V 0.05PF MLO", Type=MLO, Val=1PF, Vol=50V
D1: library part CMP-1667-00003-1, "Surface Mount Schottky Barrier Rectifier, 40 V, 3 A, -55 to 150 degC, 2-Pin SMA, RoHS, Tape and Reel", Case\Package=SMA, Forward Current="3 A", Forward Voltage="500 mV", Max Operating Temperature="125 degC", Max Surge Current="80 A", Min Operating Temperature="-55 degC", Package Quantity=5000, Peak Reverse Current="500 uA", ComponentLink1Description="Manufacturer URL", ComponentLink1URL=http://www.diodes.com/, ComponentLink2Description=Datasheet, ComponentLink2URL=http://www.diodes.com/_files/datasheets/ds30891.pdf, DatasheetVersion="Rev. 17 - 2, 09/2015", Elements=1, Height="2.1 mm", Length="4.6 mm", Mount="Surface Mount", Mounting Technology="Surface Mount", PackageDescription="2-Pin Surface Mounted Assembly, Body 4.3 x 2.605 mm, Height 2.4 mm", PackageReference=SMA-2, Packaging="Tape and Reel", Pins=2, Radiation Hardening=No, REACH SVHC="No SVHC", RoHSCompliant=true, Width="2.92 mm"
D2: library part CMP-1060-00481-1, "Zener Voltage Regulator, 500 mW, 2-Pin SOD-123, Pb-Free, Tape and Reel", Manufacturer="On Semiconductor", ComponentLink1Description="Manufacturer URL", ComponentLink1URL=http://www.onsemi.com/, ComponentLink2Description=Datasheet, ComponentLink2URL=http://www.onsemi.cn/pub_link/Collateral/MMSZ5221BT1-D.PDF, ComponentLink3Description="Package Specification", ComponentLink3URL=http://www.onsemi.com/pub_link/Collateral/425-04.PDF, DatasheetVersion="Rev. 12", Mounting Technology="Surface Mount", P Max (W)=0.5, PackageDescription="2-Pin SOD, Body 1.6 x 2.69 mm", PackageReference=SOD-123-2-425-04, PackageVersion="Rev. G, 10/2009", Packing="Tape and Reel", PartNumber=SZMMSZ5243BT1G, RoHS=Pb-Free, VZ Typ (V)=13
D3: library part CMP-1063-00099-1, "Transient Voltage Suppressor, Micro-Packaged Diode for ESD Protection, 2-Pin SOD-523, Pb-Free, Tape and Reel", Manufacturer="On Semiconductor", ComponentLink1Description="Manufacturer URL", ComponentLink1URL=http://www.onsemi.com/, ComponentLink2Description=Datasheet, ComponentLink2URL=http://www.onsemi.cn/pub_link/Collateral/ESD5Z2.5T1-D.PDF, ComponentLink3Description="Package Specification", ComponentLink3URL=http://www.onsemi.com/pub_link/Collateral/502-01.PDF, DatasheetVersion="Rev. 10", Direction=Unidirectional, IR Max (uA)=0.01, Mounting Technology="Surface Mount", Number of Lines=1, PackageDescription="2-Pin SOD, Body 1.2 x 0.8 mm", PackageReference=SOD-523-2-502-01, PackageVersion="Rev. E, 09/2010", Packing="Tape and Reel", PartNumber=ESD5Z12T1G, PPK Max (W)=240, RoHS=Pb-Free, V(BR) Min (V)=14.1, VRWM Max (V)=12
D4 D5: "Red 631nm LED Indication - Discrete 1.9V 0805 (2012 Metric)", Supplier Part Number 1=492-2281-1-ND, Supplier 1=Digi-Key
D6: library part CMP-1055-00486-1, "Schottky Barrier Diode, 2-Pin SOD-523, Pb-Free, Tape and Reel", Manufacturer="On Semiconductor", ComponentLink1Description="Manufacturer URL", ComponentLink1URL=http://www.onsemi.com/, ComponentLink2Description=Datasheet, ComponentLink2URL=http://www.onsemi.cn/pub_link/Collateral/NSR0340V2T1-D.PDF, ComponentLink3Description="Package Specification", ComponentLink3URL=http://www.onsemi.com/pub_link/Collateral/502-01.PDF, Configuration=Single, DatasheetVersion="Rev. 1", IFSM Max (A)=1, Mounting Technology="Surface Mount", PackageDescription="2-Pin SOD, Body 1.2 x 0.8 mm", PackageReference=SOD-523-2-502-01, PackageVersion="Rev. E, 09/2010", Packing="Tape and Reel", PartNumber=NSR0340V2T1G, RoHS=TRUE
D7: "Green 574nm LED Indication - Discrete 1.9V 0805 (2012 Metric)", Supplier Part Number 1=492-2525-1-ND, Supplier 1=Digi-Key
D8 D9: library part CMP-2000-05191-1, "TVS Diode Array, 30 pF, 30 KV, -40 to 85 degC, 4-Pin SOT143, RoHS, Tape and Reel", Capacitance Value=30pF, Clamping Voltage=8V, Leakage Current=0.1uA, Manufacturer=Littelfuse, Operating Temp Range=-40Cto85C, Operating Temperature Classification=Industrial, Operating Temperature Max Deg. C=85C, Operating Temperature Min Deg. C=-40C, Package / Case=SOT-143, Reverse Stand-off Voltage=5.5(Min)V, Working Voltage=5.5V, Working Voltage (Max)=5.5V(Min), Clamping Voltage (Max)=8V, Configuration=Triple, Datasheet URL=https://datasheet.ciiva.com/15143/getdatasheetpartid-116020-15143550.pdf, Datasheet Version=Dec-13, Direction Type=Uni-Directional, Leakage Current (Max)=0.1uA, Manufacturer URL=http://www.littelfuse.com/, Mounting=SurfaceMount, Mounting Style=SurfaceMount, Number of Elements=3, Package Type=SOT-143, Packaging=TapeandReel, Pin Count=3+Tab, Polarity=Uni-Directional, Product Depth (mm)=1.4mm, Product Height (mm)=1.05mm, Product Length (mm)=3.04mm, Rad Hardened=No, Suppressor Type=TVS
F1: "Polymeric PTC Resettable Fuse 15V 100mA Ih Surface Mount 0603 (1608 Metric), Concave", Supplier Part Number 1=MF-FSMF010X-2CT-ND, Supplier 1=Digi-Key
F2: "PTC Resettable Fuse, 0.8 W, 30 V, -40 to 85 degC, 2-Pin SMD, RoHS, Tape and Reel", Current - Hold (Ih) (Max)=500mA, Current - Max=100A, Current - Trip (It)=1A, Manufacturer=Littelfuse-Inc., Manufacturer 1=Littelfuse, Package / Case=1812(4532Metric),Concave, Package Description="2-Pin Surface Mount Device, Body 4.55 x 3.24 mm", Package Reference=1812, Voltage - Max=30V, Category=CircuitProtection, Datasheet URL=http://www.littelfuse.com/~/media/electronics/datasheets/resettable_ptcs/littelfuse_ptc_1812l_datasheet.pdf.pdf, Datasheet Version=02/2016, Family=PTCResettableFuses, Manufacturer Part Number 1=1812L050/30PR, Manufacturer URL=http://www.littelfuse.com/, Mounting Technology=SurfaceMount, Packaging=Tape&Reel(TR), R Min/Max=0.150~1.000Ohm, Series=POLY-FUSE®,1812L, Time to Trip=0.15s
FB1: library part 742792097, "Ferrite Chip 1000 mA 1500 Ohms Differential Mode - Single 0805 Footprint", Current (mA)=1000, DC Resistance (ohms)=0.3, Frequency="100 MHz", Impedance at Freq (ohms)=1500, Manufacturer="Wurth Electronics", Operating Temperature Range="-55 to +125 °C", PCB Package=0805, ComponentLink1Description="Manufacturer Website", ComponentLink1URL=http://www.we-online.com, ComponentLink2Description="Component Datasheet", ComponentLink2URL=http://www.we-online.com/eisos/pdf/742792097.pdf, ComponentLink3Description="Octopart Link", ComponentLink3URL=http://octopart.com/partsearch/#search/requestData&q=742792097, Description in Visual="Ferrite SMT 1000mA 1500Ohm Dif Mode 0805", Filter type="Differential Mode - Single", Manufacturer P/N=742792097, P/N=742792097, Usage="Power Supply"
FB2: library part MMZ1608S121A, "Ferrite Chip 500 mA 120 Ohms Differential Mode - Single 0603 Footprint", Current (mA)=500, DC Resistance (ohms)=0.2, Frequency="100 MHz", Impedance at Freq (ohms)=120, Manufacturer=TDK, Operating Temperature Range="-55 to +125 °C", PCB Package=0603, ComponentLink1Description="Manufacturer Website", ComponentLink1URL=http://www.tdk.com/, ComponentLink2Description="Component Datasheet", ComponentLink2URL=http://www.tdk.co.jp/tefe02/e9412_mmz1608.pdf, ComponentLink3Description="Octopart Link", ComponentLink3URL=http://octopart.com/partsearch/#search/requestData&q=MMZ1608S121A, Description in Visual="Ferrite SMT 500mA 120Ohm Dif Mode 0603", Filter type="Differential Mode - Single", Manufacturer P/N=MMZ1608S121A, P/N=MMZ1608S121A, Usage="Signal Line"
J1: "Connector Header Through Hole 2 position 0.163\" (4.14mm)", Built_By=EMA_UL_Team, Copyright="Copyright (C) 2018 Accelerated Designs. All rights reserved", Manufacturer_Part_Number=1-770872-0, RefDes=RefDes, Type=DEV, Vendor="TE Connectivity"
J2: "Connector Header Through Hole 8 position 0.079\" (2.00mm)", Supplier Part Number 1=455-1710-ND, Supplier 1=Digi-Key
J3: "Connector Header Through Hole 4 position 0.098\" (2.50mm)", Manufacturer=JST, Supplier Part Number 1=73M9436, Datasheet Version=Apr-09, Manufacturer URL=http://www.jst.com/home2.html, No of Positions=4, Style/Orientation=StraightHeader/Plug, Supplier 1=Newark, Termination=Crimp, Type=ShroudedHeader
J4: "CONN TAB .250 STR QC TIN PCB", Package Quantity=2000, Supplier Part Number 1=A100452CT-ND, Body Material=Brass, Body Plating=Tin, Contact Material=Brass, Contact Plating=Tin, Depth=7.92mm, ELV=Compliant, Gender=Male, Hole Diameter=0.055inch, Insulated Wire Support=Yes, Insulation=Non-Insulated, Lead Free="Lead Free", Length=0.552inch, Material=Brass, Mating Tab Width=0.25inch, Mount="Through Hole", Packaging="Tape and Reel", PCB Thickness=0.062inch, Plating=Tin, REACH SVHC=Unknown, Supplier 1=Digi-Key, Tab Length=0.352inch, Tab Thickness=0.032inch, Tab Width=0.25inch, Terminal Material=Brass, Termination=Tab
K1: "RELAY GEN PURPOSE SPDT 10A 5V", coil_resistance=63Ω, coil_voltage=5V, contact_current_rating=10A, Digikey Part Number=Z1014-ND, Manufacturer="Omron Electronics Inc.", Mouser Part Number=653-G5LE-1-DC5, Octopart Part Number=11883359022, Package=PTH_RELAY_21MM6_15MM6, Part Number="G5LE-1 DC5", Temperature="-40°C to +85°C", Temperature Range High=+85°C, Temperature Range Low=-40°C, Voltage=30V, ComponentLink1Description=Upverter, ComponentLink1URL=https://upverter.com/upn/revision/737368c9962922c8/, ComponentLink2Description=Datasheet, ComponentLink2URL=https://www.components.omron.com/components/web/PDFLIB.nsf/0/0293ACA6B03161CD86257538007424DB/$file/G5LE_0813.pdf, contacts_type=SPDT, Digikey Description="RELAY GEN PURPOSE SPDT 10A 5V", helpURL=https://upverter.com/upn/revision/737368c9962922c8/, Lead Free=yes, Num Pins=5, Operate Time=10ms, Release Time=5ms, RoHS=TRUE, Supplier 1=Digi-Key, Supplier 2=Mouser, Supplier Part Number 1=Z1014-ND, Supplier Part Number 2=653-G5LE-1-DC5, Symbol 0 0="SPDT Relay", Type="integrated circuit"
L1 L3: library part CMP-0007-00013-1, "Semi-shielded Power Inductor, 22 uH, +/- 20%, 0.6 A, -40 to 125 degC, 3 x 3 x 1.5 mm SMD, RoHS and Halogen Free, Tape and Reel", Inductance="22 uH", Inductance tolerance="+/- 20%", Manufacturer=Bourns, Operating Temperature="-40 to 125 degC", Rated current="0.6 A", Resistance to Solder Heat="+260 degC for 10 sec.", ComponentLink1Description="Manufacturer URL", ComponentLink1URL=http://www.bourns.com/, ComponentLink2Description=Datasheet, ComponentLink2URL=http://www.bourns.com/data/global/pdfs/SRN3015.pdf, ComponentLink3Description="Package Specification", ComponentLink3URL=http://www.bourns.com/data/global/pdfs/SRN3015.pdf, DatasheetVersion=Aug-11, DCR Max="0.622 Ohm", Isat="0.58 A", Mounting Technology="Surface Mount", PackageDescription="2-Pin SMD, Body 3 x 3 mm, Height 1.5 mm", PackageReference=SRN3015, Packing="Tape and Reel", PartNumber=SRN3015-220M, RoHS=TRUE, SRF Min="28 MHz"
L2: library part CMP-0222-00041-1, "SMD Common Mode Noise Suppressor WE-CNSW, Z = 260 Ohm", ComponentLink1Description="Manufacturer Link", ComponentLink1URL=http://www.we-online.com, ComponentLink2Description=Datasheet, ComponentLink2URL=http://www.we-online.de/katalog/media/pdf/744231261.pdf, DatasheetVersion="ver 4, Nov-2010", Impedance="260 Ohm", PackageDescription="SMD Inductor, 4-Leads, Body 1.4 x 2.2 mm", PackageReference=WE-CNSW-0805, PackageVersion=2010
L4: "Common Mode Filter, 1000 Ohm Impedance, 1.2 A, 60 V, -40 to 85 degC, 4-Pin SMD, RoHS, Tape and Reel", Current=1.5A, DC Resistance (DCR)=50mOhm, Inductance=-, Manufacturer=TDK, Operating Temperature=-40degC~85degC, Package / Case=1210(3225Metric),4Lead, Package Description="4-Pin Surface Mount Device, Body 3.2 x 2.5 mm, Pitch 1.15 mm", Package Reference=ACP3225-102-2P-T000-4, Standard Package=1, Category=Filters, Datasheet URL=https://datasheet.ciiva.com/30106/acp3225-series-30106482.pdf, Datasheet Version="Rev. 8, 07/2011", Family=CommonModeChokes, Featured Product=ACP3225SeriesFilter, Filter type=PowerLine, Height (Max)="0.079\"(2.00mm)", Impedance=1kOhm, Manufacturer 1=TDK, Manufacturer Part Number 1=ACP3225-102-2P-T000, Manufacturer URL=http://www.tdk.com/, Mounting Type=SurfaceMount, Number of Lines=2, Online Catalog=ACPSeries, Other Names=445-8637-6, Packaging=Digi-Reel, Series=ACP, Size / Dimension="0.126\"Lx0.098\"W(3.20mmx2.50mm)"
MTG1 MTG2 MTG3 MTG4: library part "MTG M3", "PCB Mounting for M3 Screw", PCB Package=M3, P/N="MTG M3"
NT1: "Net Tie (No BOM)"
PS1: "Isolated Module DC DC Converter 2 Output 15V -15V   100mA, 100mA 9V - 18V Input", Supplier Part Number 1=1951-2538-ND, Supplier 1=Digi-Key
PS2: "Isolated Module DC DC Converter 2 Output 5V -5V   200mA, 200mA 10.8V - 13.2V Input", Supplier Part Number 1=811-3393-5-ND, Supplier 1=Digi-Key
Q1: library part CMP-1258-00134-1, "N-Channel Enhancement Mode MOS Transistor, 20 V, 1.05 A, -55 to 150 degC, 3-Pin SOT23, Tape and Reel", Manufacturer="NXP Semiconductors", Channel Type=N, Ciss [typ] (pF)=152, Code_JEDEC=TO-236AB, ComponentLink1Description="Manufacturer URL", ComponentLink1URL=http://www.nxp.com/, ComponentLink2Description=Datasheet, ComponentLink2URL=http://www.nxp.com/documents/data_sheet/BSH105.pdf, ComponentLink3Description="Package Specification", ComponentLink3URL=http://www.nxp.com/documents/outline_drawing/sot023_po.pdf, Coss [typ] (pF)=71, DatasheetVersion="Rev. 1.000", ID [max] (A)=1.05, Mounting Technology="Surface Mount", PackageDescription="3-Pin Small Outline Transistor Package, Body 2.9 x 1.3 mm, Pitch 0.95 mm", PackageReference=SOT23, PackageVersion="06-03-16, 03/2006", Packing="Tape & Reel", PartNumber=BSH105,215, Qr [typ] (nC)=19, VDS [max] (V)=20, VGSth [typ] (V)=0.57
R1: "Resistor Surface Mount, 2 Ohms, 0805 Footprint, 1% Tolerance 0.125W", Manufacturer=Various, PCB Package=0805, Power_Rating=0.125W, Tolerance=1%, Description in Visual="Res SMT 2 0805  1%  0.125W", Manufacturer P/N=Various, P/N="RES 0805 2 1%", Tol=1%, Val=2
R2: "Resistor Surface Mount, 330K Ohms, 0603 Footprint, 1% Tolerance 0.1W", Manufacturer=Various, PCB Package=0603, Power_Rating=0.1W, Tolerance=1%, Description in Visual="Res SMT 330K 0603  1%  0.1W", Manufacturer P/N=Various, P/N="RES 0603 330K 1%", Tol=1%, Val=330K
R3 R20 R25 R31: library part CMP-2001-01491-1, Manufacturer=Yageo, Part Number=RT0805BRE071ML
R4 R11: "Resistor Surface Mount, 10K Ohms, 0603 Footprint, 1% Tolerance 0.1W", Manufacturer=Various, PCB Package=0603, Power_Rating=0.1W, Tolerance=1%, Description in Visual="Res SMT 10K 0603  1%  0.1W", Manufacturer P/N=Various, P/N="RES 0603 10K 1%", Tol=1%, Val=10K
R5 R10 R15: "10 kOhms 0.5W, 1/2W PC Pins Through Hole Trimmer Potentiometer Cermet 4 Turn Top Adjustment", Supplier Part Number 1=3339H-103LF-ND, ComponentLink2Description=Datasheet, ComponentLink2URL=https://www.ttelectronics.com/TTElectronics/media/ProductFiles/Trimmers/Datasheets/67.pdf, Supplier 1=Digi-Key
R6 R7 R8 R9: "Resistor Surface Mount, 0 Ohms, 0603 Footprint, 5% Tolerance 0.1W", Manufacturer=Various, PCB Package=0603, Power_Rating=0.1W, Tolerance=5%, Description in Visual="Res SMT 0 0603  5%  0.1W", Manufacturer P/N=Various, P/N="RES 0603 0 5%", Tol=5%, Val=0
R12 R14: library part CMP-2000-02599-1, Manufacturer=Susumu, Part Number=RR0816P-301-D
R13: library part CMP-2000-02514-1, Manufacturer=Susumu, Part Number=RR0816P-183-D
R16 R18: library part CMP-2000-02579-1, Manufacturer=Susumu, Part Number=RR0816P-272-D
R17: library part CMP-2000-04621-1, Manufacturer=Yageo, Part Number=RT0603DRE072KL
R19 R24 R30: "Resistor Surface Mount, 620 Ohms, 0603 Footprint, 1% Tolerance 0.1W", Manufacturer=Various, PCB Package=0603, Power_Rating=0.1W, Tolerance=1%, Description in Visual="Res SMT 620 0603  1%  0.1W", Manufacturer P/N=Various, P/N="RES 0603 620 1%", Tol=1%, Val=620
R21: "Resistor Surface Mount, 49.9K Ohms, 0603 Footprint, 0.1% Tolerance 0.1W", Manufacturer=Various, PCB Package=0603, Power_Rating=0.1W, Tolerance=0.1%, Description in Visual="Res SMT 49.9K 0603  0.1%  0.1W", Manufacturer P/N=Various, P/N="RES 0603 49.9K 0.1%", Tol=0.1%, Val=49.9K
R22 R28: library part CMP-2001-00870-1, Manufacturer=Panasonic, Part Number=ERA6AEB6813V
R23 R29: "Resistor Surface Mount, 200 Ohms, 0603 Footprint, 1% Tolerance 0.1W", Manufacturer=Various, PCB Package=0603, Power_Rating=0.1W, Tolerance=1%, Description in Visual="Res SMT 200 0603  1%  0.1W", Manufacturer P/N=Various, P/N="RES 0603 200 1%", Tol=1%, Val=200
R26: "Resistor Surface Mount, 47K Ohms, 0603 Footprint, 1% Tolerance 0.1W", Manufacturer=Various, PCB Package=0603, Power_Rating=0.1W, Tolerance=1%, Description in Visual="Res SMT 47K 0603  1%  0.1W", Manufacturer P/N=Various, P/N="RES 0603 47K 1%", Tol=1%, Val=47K
R27: library part CMP-2000-02393-1, Manufacturer=Susumu, Part Number=RG1608P-9312-B-T5
R32 R35: "Resistor Surface Mount, 51K Ohms, 0603 Footprint, 0.05% Tolerance 0.1W", Manufacturer=Various, PCB Package=0603, Power_Rating=0.1W, Tolerance=0.1%, Description in Visual="Res SMT 62.6K 0603  0.05%  0.1W", Manufacturer P/N=Various, P/N="RES 0603 62.6K 0.1%", Tol=0.1%, Val=62.6K
R33 R34 R36 R37: "Resistor Surface Mount, 100K Ohms, 0603 Footprint, 0.1% Tolerance 0.1W", Manufacturer=Various, PCB Package=0603, Power_Rating=0.1W, Tolerance=0.1%, Description in Visual="Res SMT 100K 0603  0.1%  0.1W", Manufacturer P/N=Various, P/N="RES 0603 100K 0.1%", Tol=0.1%, Val=100K
SW1: "Slide Switch SPDT Through Hole", Supplier Part Number 1=563-1388-ND, Supplier 1=Digi-Key